# Altium PCB PCB1.PcbDoc (part 2 of 2)
Units mm, origin at the board's own origin, x right, y up, seen from the top; angles counter-clockwise.
Board outline 100 x 100 mm, 2 copper layers (Top Layer, Bottom Layer); 83 components, 120 nets, 440 pads, 148 vias.
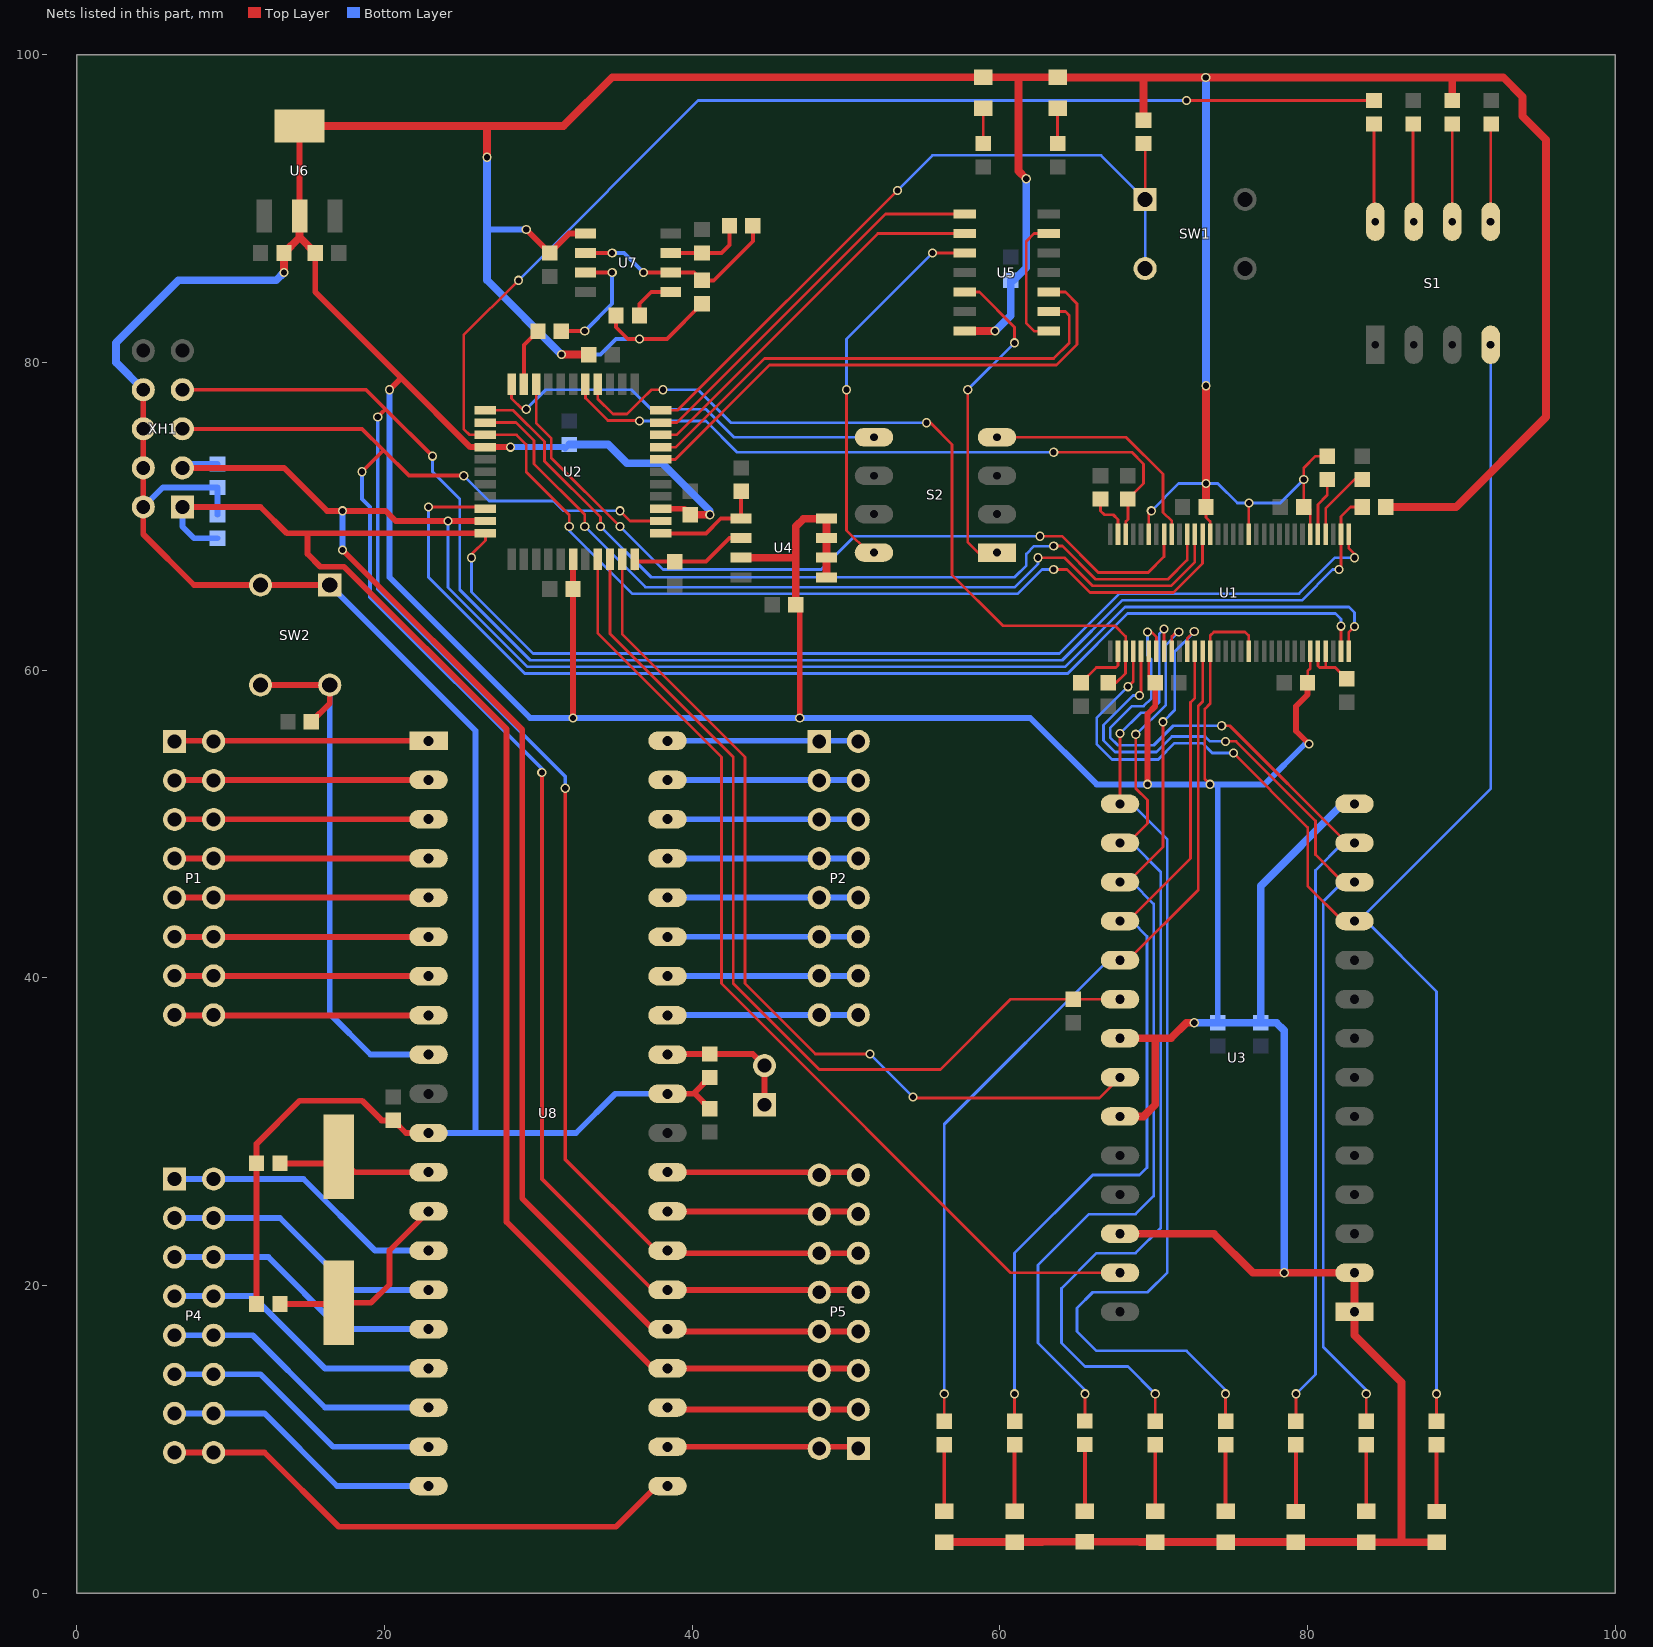
[diagram p2: the nets of this part, all layers, seen from the top]

## Via types
v1: diameter 0.6, hole 0.4, Top Layer to Bottom Layer, 144 vias
v2: diameter 4, hole 3, Top Layer to Bottom Layer, 4 vias

## Nets (pads, with @x,y where several pads share a name; then routed paths per layer and width w, separated by ;. In a path a pad name is that pad's centre, name@x,y a point inside that pad or via, vN(x,y) a via of type N, cw(c..) or ccw(c..) an arc to the next point about the centre after c; other vN are vias at no path point) (continued)
DAT03: U1.57 U2.42 | length 51.8
  Top Layer w0.178: U2.42@29.858,78.598 29.858,76.06 30.836,75.082 30.836,73.812 v1(35.306,69.342) ; v1(62.609,68.705) 62.619,68.715 64.03,68.715 66.4,66.345 69.647,66.345 70.68,67.378 U1.57@70.68,68.824
  Bottom Layer w0.178: v1(35.306,69.342) 38.1,66.548 48.389,66.548 50.546,68.705 v1(62.609,68.705)
DAT04: S2.4 U1.56 | length 15.6
  Top Layer w0.178: S2.4@60.198,75.144 68.215,75.144 70.612,72.747 70.612,70.258 71.18,69.69 U1.56@71.18,68.824
"DAT04 CPLD": S2.5 U2.44 | length 27
  Top Layer w0.178: U2.44@28.258,78.598 28.258,77.66 28.956,76.962 v1(29.21,76.962)
  Bottom Layer w0.178: v1(29.21,76.962) 30.48,78.232 36.068,78.232 37.338,76.962 40.894,76.962 42.712,75.144 S2.5@52.198,75.144
DAT05: U1.54 U2.1 | length 55.6
  Top Layer w0.178: U2.1@26.558,76.898 28.361,76.898 30.404,74.855 30.404,73.585 34.036,69.953 v1(34.036,69.342) ; v1(63.5,68.072) 64.062,68.072 66.221,65.913 70.939,65.913 72.18,67.154 U1.54@72.18,68.824
  Bottom Layer w0.178: v1(34.036,69.342) 37.338,66.04 60.96,66.04 61.722,66.802 61.722,67.564 62.221,68.063 63.491,68.063 v1(63.5,68.072)
DAT06: U1.53 U2.2 | length 56.1
  Top Layer w0.178: U2.2@26.558,76.098 28.55,76.098 29.718,74.93 29.718,73.406 33.02,70.104 v1(33.02,69.342) ; v1(62.484,67.31) 64.213,67.31 66.042,65.481 71.118,65.481 72.68,67.043 U1.53@72.68,68.824
  Bottom Layer w0.178: v1(33.02,69.342) 36.965,65.397 60.976,65.397 62.484,66.905 v1(62.484,67.31)
DAT07: R17.1 U1.52 U2.3 | length 129.7
  Top Layer w0.178: v1(28.702,85.344) 25.146,81.788 25.146,75.692 25.54,75.298 U2.3@26.558,75.298 28.588,75.298 29.21,74.676 29.21,72.898 32.004,70.104 v1(32.004,69.342) ; v1(63.5,66.548) 64.365,66.548 65.863,65.049 71.297,65.049 73.18,66.933 U1.52@73.18,68.824 ; v1(72.136,97.028) R17.1@84.328,97.028
  Bottom Layer w0.178: v1(28.702,85.344) 40.386,97.028 v1(72.136,97.028) ; v1(32.004,69.342) 32.004,69.088 36.127,64.965 61.155,64.965 62.738,66.548 v1(63.5,66.548)
DATA00: R22.2 S1.4 U1.4 U3.11 | length 107.9
  Top Layer w0.178: v1(68.326,58.928) 68.68,59.282 U1.4@68.68,61.224 ; v1(75.184,54.61) 80.01,49.784 80.01,45.974 82.296,43.688 U3.11@83.058,43.688 ; R22.2@88.392,11.176 v1(88.392,12.954)
  Bottom Layer w0.178: v1(68.326,58.928) 66.294,56.896 66.294,55.2 67.303,54.191 70.3,54.191 71.362,55.253 73.168,55.253 73.811,54.61 v1(75.184,54.61) ; U3.11@83.058,43.688 U3.11@83.312,43.688 ; v1(88.392,12.954) 88.392,39.116 83.82,43.688 U3.11@83.312,43.688 ; S1.4@91.908,81.154 91.908,52.284 U3.11@83.312,43.688
DATA01: R23.2 U1.5 U3.12 | length 67
  Top Layer w0.178: v1(69.088,58.35) 69.18,58.258 U1.5@69.18,61.224 ; v1(74.676,55.372) 75.351,55.372 80.518,50.205 80.518,48.006 82.296,46.228 U3.12@83.058,46.228 ; R23.2@83.82,11.176 v1(83.82,12.954)
  Bottom Layer w0.178: v1(69.088,58.35) 68.657,58.35 66.743,56.436 66.743,55.435 67.492,54.686 70.184,54.686 71.183,55.685 73.347,55.685 73.66,55.372 v1(74.676,55.372) ; U3.12@83.058,46.228 82.296,46.228 81.026,44.958 81.026,16.002 83.82,13.208 v1(83.82,12.954)
DATA02: R24.2 U1.7 U3.13 | length 69.8
  Top Layer w0.178: v1(69.596,62.484) 69.85,62.484 70.18,62.154 U1.7@70.18,61.224 ; v1(74.422,56.388) 74.946,56.388 82.566,48.768 U3.13@83.058,48.768 U3.13@83.312,48.768 ; R24.2@79.248,11.176 v1(79.248,12.954)
  Bottom Layer w0.178: v1(69.596,62.484) 69.596,60.96 69.85,60.706 69.85,58.166 69.342,57.658 68.58,57.658 67.175,56.253 67.175,55.614 67.671,55.118 70.005,55.118 71.275,56.388 v1(74.422,56.388) ; v1(79.248,12.954) 80.518,14.224 80.518,15.494 80.518,46.99 82.296,48.768 U3.13@83.058,48.768
DATA03: R25.2 U1.8 U3.15 | length 68.1
  Top Layer w0.178: U3.15@67.818,51.308 v1(67.818,55.88) ; U1.8@70.673,61.217 U1.8@70.68,61.224 v1(70.68,62.67) ; R25.2@74.676,11.176 v1(74.676,12.954)
  Bottom Layer w0.178: U3.15@67.818,51.308 68.58,51.308 70.891,48.997 70.891,20.853 69.596,19.558 66.04,19.558 65.024,18.542 65.024,17.018 66.294,15.748 72.136,15.748 74.676,13.208 v1(74.676,12.954) ; v1(67.818,55.88) 69.164,57.226 69.672,57.226 70.358,57.912 70.358,62.348 v1(70.68,62.67)
DATA04: R26.2 U1.9 U3.16 | length 65.3
  Top Layer w0.178: U3.16@67.818,48.768 68.326,48.768 69.596,50.038 69.596,51.562 68.834,52.324 v1(68.834,55.829) ; R26.2@70.104,11.176 v1(70.104,12.954) ; U1.9@71.18,61.224 71.18,62.2 71.464,62.484 v1(71.628,62.484)
  Bottom Layer w0.178: U3.16@67.818,48.768 68.58,48.768 70.46,46.888 70.46,23.724 68.834,22.098 66.294,22.098 64.008,19.812 64.008,16.256 65.532,14.732 68.326,14.732 v1(70.104,12.954) ; v1(68.834,55.829) 68.834,55.777 70.79,57.733 70.79,61.646 v1(71.628,62.484)
DATA05: R27.2 U1.11 U3.17 | length 62.6
  Top Layer w0.178: R27.2@65.532,11.192 v1(65.532,12.954) ; U3.17@67.818,46.228 68.326,46.228 70.612,48.514 v1(70.612,56.642) ; U1.11@72.18,61.224 72.18,62.059 v1(72.644,62.523)
  Bottom Layer w0.178: v1(65.532,12.954) 65.532,13.208 62.484,16.256 62.484,21.336 65.786,24.638 68.834,24.638 70.002,25.806 70.002,44.806 68.58,46.228 U3.17@67.818,46.228 ; v1(70.612,56.642) 71.374,57.404 71.374,61.214 72.644,62.484 v1(72.644,62.523)
DATA06: R28.2 U1.12 U3.18 | length 58.9
  Top Layer w0.178: R28.2@60.96,11.176 v1(60.96,12.954) ; U3.18@67.818,43.688 68.326,43.688 72.39,47.752 72.39,57.912 72.68,58.202 U1.12@72.68,61.224
  Bottom Layer w0.178: v1(60.96,12.954) 60.96,22.098 66.04,27.178 69.088,27.178 69.571,27.661 69.571,42.697 68.58,43.688 U3.18@67.818,43.688
DATA07: R29.2 U1.13 U3.19 | length 57.8
  Top Layer w0.178: R29.2@56.388,11.176 v1(56.388,12.954) ; U3.19@67.818,41.148 68.326,41.148 72.898,45.72 72.898,57.658 73.187,57.947 73.187,61.217 U1.13@73.18,61.224 U1.13@73.173,61.231
  Bottom Layer w0.178: v1(56.388,12.954) 56.388,30.48 67.056,41.148 U3.19@67.818,41.148
GND: C1.2 C2.2 C3.2 C4.2 C5.2 C6.2 C7.2 C8.2 C9.2 C10.2 C11.2 C12.2 C13.2 C14.2 C15.2 C16.2 C17.2 C18.2 C19.2 C20.2 C21.2 C22.1 D1.1 D2.1 D3.1 D4.1 D5.1 D6.1 D7.1 D8.1 D9.1 D10.1 R3.1 R4.1 R11.1 R13.1 R18.1 R19.1 SW2.1 SW2.2 U1.6 U1.14 U1.19 U1.27 U1.38 U1.46 U1.51 U1.59 U2.4 U2.17 U2.25 U3.1 U3.2 U3.14 U3.21 U3.23 U3.26 U4.1 U4.2 U4.3 U4.4 U4.7 U5.7 U6.2 U6.4 U7.1 U8.11 U8.31 XH1.2 XH1.4 XH1.6 XH1.8 | length 692.5
  Top Layer w0.178: U1.6@69.68,61.224 69.68,59.606 C6.2@70.104,59.182 ; U1.59@69.68,68.824 69.68,70.188 v1(69.85,70.358) ; C4.2@73.406,70.612 73.406,69.933 73.673,69.666 73.673,68.831 U1.51@73.68,68.824 ; v1(73.66,52.578) 73.33,52.908 73.33,57.479 73.68,57.829 U1.14@73.68,61.224 73.68,62.25 73.914,62.484 75.946,62.484 76.18,62.25 U1.19@76.18,61.224 ; U1.46@76.18,68.824 76.18,70.846 v1(76.2,70.866) ; C5.2@80.01,59.182 80.01,59.944 80.18,60.114 U1.27@80.18,61.224 ; U1.38@80.18,68.824 80.173,68.831 80.173,70.449 80.01,70.612 C3.2@79.756,70.612 v1(79.756,72.39) 79.756,73.152 80.518,73.914 R18.1@81.28,73.914
  Top Layer w0.254: C7.2@33.274,80.518 C7.2@33.274,80.536 ; C13.2@35.052,83.058 35.052,82.296 35.814,81.534 v1(36.576,81.534) 38.354,81.534 C12.2@40.64,83.82
  Top Layer w0.381: XH1.8@4.318,78.232 XH1.6@4.318,75.692 XH1.4@4.318,73.152 XH1.2@4.318,70.612 4.318,68.834 7.62,65.532 SW2.2@11.938,65.532 SW2.1@16.438,65.532 ; C19.2@11.684,18.796 C18.2@11.684,27.94 11.684,29.21 14.478,32.004 18.542,32.004 19.812,30.734 C21.2@20.574,30.734 21.396,29.912 U8.11@22.86,29.912 ; U6.2@14.478,89.531 U6.4@14.478,95.381 ; C2.2@15.494,87.122 15.494,84.582 21.082,78.994 ; v1(20.32,78.232) 21.082,78.994 ; v1(28.194,74.498) U2.4@26.558,74.498 25.578,74.498 21.082,78.994 ; v1(29.21,88.646) C11.2@30.734,87.122 32.004,88.392 U7.1@33.058,88.392 ; v1(32.258,56.896) C8.2@32.258,65.278 U2.17@32.258,67.198 ; U2.25@37.958,70.498 39.484,70.498 C9.2@39.878,70.104 ; U8.31@38.4,32.462 40.082,32.462 ; C22.1@41.148,31.496 40.182,32.462 40.082,32.462 ; C20.2@41.148,33.528 40.082,32.462 ; C16.2@46.736,64.262 46.99,64.008 v1(46.99,56.896) ; v1(69.596,52.578) 69.596,57.15 70.104,57.658 C6.2@70.104,59.182 ; C5.2@80.01,59.182 80.01,58.42 79.248,57.658 79.248,56.048 v1(80.094,55.202)
  Top Layer w0.508: v1(13.462,85.852) C1.2@13.462,87.122 14.478,88.138 ; U6.2@14.478,89.531 14.478,88.138 ; U6.4@14.478,95.381 26.67,95.381 ; C2.2@15.494,87.122 14.478,88.138 ; v1(26.67,93.349) 26.67,95.381 ; v1(31.496,80.518) C7.2@33.274,80.518 ; C9.2@39.878,70.104 v1(41.148,70.104) ; U4.7@43.18,67.31 46.736,67.31 ; C16.2@46.736,64.262 46.736,67.31 ; U4.1@48.73,66.04 U4.2@48.73,67.31 U4.3@48.73,68.58 U4.4@48.73,69.85 47.244,69.85 46.736,69.342 46.736,67.31 ; D8.1@56.388,3.318 D7.1@60.96,3.318 ; U5.7@57.727,82.042 v1(59.69,82.042) ; D7.1@60.976,3.334 D7.1@60.96,3.318 ; v1(61.722,91.948) 61.214,92.456 61.214,98.552 ; 62.738,3.318 D7.1@60.96,3.318 ; 62.754,3.334 D6.1@65.532,3.334 ; D6.1@65.548,3.318 D6.1@65.532,3.334 ; U3.26@67.818,23.368 73.914,23.368 76.454,20.828 v1(78.486,20.828) U3.2@83.058,20.828 U3.1@83.058,18.288 83.058,16.764 86.114,13.708 86.114,3.302 ; U3.23@67.818,30.988 69.342,30.988 70.104,31.75 70.104,36.068 ; U3.21@67.818,36.068 70.104,36.068 ; 69.088,3.334 D6.1@65.532,3.334 ; 69.104,3.318 D5.1@70.104,3.318 D4.1@74.676,3.318 ; R13.1@69.342,95.758 69.342,98.298 ; v1(72.644,37.084) 72.136,37.084 71.12,36.068 70.104,36.068 ; C4.2@73.406,70.612 v1(73.406,72.136) v1(73.406,78.486) ; 81.026,3.302 D3.1@79.248,3.302 74.692,3.302 D4.1@74.676,3.318 ; D2.1@83.804,3.302 D2.1@83.82,3.318 ; R19.1@85.09,70.612 89.662,70.612 95.504,76.454 95.504,94.488 93.98,96.012 93.98,97.282 92.726,98.536 89.408,98.536 ; D1.1@88.392,3.302 86.114,3.302 ; R11.1@89.408,97.028 89.408,98.536 ; 26.67,95.381 31.627,95.381 34.798,98.552 61.214,98.552 ; 61.214,98.552 63.738,98.552 D10.1@63.754,98.536 v1(73.39,98.536) 89.408,98.536 ; D4.1@74.676,3.318 D2.1@83.82,3.318 ; D2.1@83.82,3.318 83.836,3.302 86.114,3.302
  Bottom Layer w0.178: v1(69.85,70.358) 71.628,72.136 v1(73.406,72.136) 74.168,72.136 75.438,70.866 v1(76.2,70.866) 78.232,70.866 v1(79.756,72.39)
  Bottom Layer w0.254: v1(31.496,80.518) 34.036,80.518 35.052,81.534 v1(36.576,81.534)
  Bottom Layer w0.381: XH1.2@4.318,70.612 5.588,71.882 R4.1@9.144,71.882 R3.1@9.144,70.104 ; SW2.1@16.438,65.532 25.908,56.062 25.908,29.912 ; v1(20.32,78.232) 20.32,66.04 29.464,56.896 v1(32.258,56.896) v1(46.99,56.896) 61.976,56.896 66.294,52.578 v1(69.596,52.578) v1(73.66,52.578) 74.168,52.578 ; U8.11@22.86,29.912 25.908,29.912 ; 26.67,88.646 v1(29.21,88.646) ; v1(28.194,74.498) 31.674,74.498 31.75,74.422 C10.2@32.004,74.676 ; U8.31@38.4,32.462 35.002,32.462 32.452,29.912 25.908,29.912 ; C14.2@74.168,37.084 74.168,52.578 ; v1(80.094,55.202) 79.84,55.202 77.216,52.578 74.168,52.578
  Bottom Layer w0.508: XH1.8@4.318,78.232 2.54,80.01 2.54,81.28 6.604,85.344 12.954,85.344 v1(13.462,85.852) ; v1(26.67,93.349) 26.67,88.646 26.67,85.344 v1(31.496,80.518) ; C10.2@32.004,74.676 34.544,74.676 35.768,73.452 38.054,73.452 41.148,70.358 v1(41.148,70.104) ; v1(59.69,82.042) 60.706,83.058 C17.2@60.706,85.344 60.904,85.344 61.722,86.162 v1(61.722,91.948) ; v1(72.644,37.084) C14.2@74.168,37.084 C15.2@76.962,37.084 ; v1(73.39,98.536) 73.406,98.552 v1(73.406,78.486) ; v1(78.486,20.828) 78.486,36.576 77.978,37.084 C15.2@76.962,37.084 ; U3.14@83.058,51.308 82.296,51.308 76.962,45.974 C15.2@76.962,37.084
I2C_SCL: R20.1 U2.22 U4.6 | length 8.1
  Top Layer w0.254: U2.22@36.258,66.612 U2.22@36.258,67.056 ; U2.22@36.258,67.198 U2.22@36.258,67.056 ; U4.6@43.18,68.58 42.418,68.58 40.894,67.056 R20.1@38.862,67.056 U2.22@36.258,67.056
I2C_SDA: R21.1 U2.23 U4.5 | length 7.4
  Top Layer w0.254: U2.23@37.958,68.898 40.905,68.898 41.857,69.85 U4.5@43.18,69.85 R21.1@43.18,71.628
IN11: U2.32 U5.1 | length 25.4
  Top Layer w0.178: U2.32@37.958,76.098 39.014,76.098 52.578,89.662 U5.1@57.727,89.662
IN12: U2.31 U5.2 | length 25.2
  Top Layer w0.178: U2.31@37.958,75.298 38.976,75.298 52.07,88.392 U5.2@57.727,88.392
IN22: S2.1 U5.5 | length 21.6
  Top Layer w0.178: U5.5@57.727,84.582 58.674,84.582 60.96,82.296 v1(60.96,81.28) ; v1(57.912,78.232) 57.912,68.326 58.594,67.644 S2.1@59.816,67.644
  Bottom Layer w0.178: v1(57.912,78.232) v1(60.96,81.28)
IN31: U2.30 U5.9 | length 32.6
  Top Layer w0.178: U2.30@37.958,74.498 38.938,74.498 44.704,80.264 63.5,80.264 64.516,81.28 64.516,83.058 64.262,83.312 U5.9@63.177,83.312
IN32: U2.29 U5.10 | length 35
  Top Layer w0.178: U2.29@37.958,73.698 38.9,73.698 45.034,79.832 63.679,79.832 65.024,81.177 65.024,83.82 64.262,84.582 U5.10@63.177,84.582
NetC12_1: C12.1 R5.2 U7.2 U7.6 | length 13.7
  Top Layer w0.254: U7.2@33.058,87.122 v1(34.798,87.122) ; v1(36.83,85.852) U7.6@38.608,85.852 40.132,85.852 C12.1@40.64,85.344 41.402,85.344 43.942,87.884 R5.2@43.942,88.9
  Bottom Layer w0.254: v1(34.798,87.122) 35.56,87.122 v1(36.83,85.852)
NetC13_1: C13.1 U7.5 | length 3.1
  Top Layer w0.254: C13.1@36.576,83.058 36.576,83.82 37.338,84.582 U7.5@38.608,84.582
NetC18_1: C18.1 U8.12 X1.1 | length 10.2
  Top Layer w0.381: C18.1@13.208,27.94 16.586,27.94 X1.1@17.018,28.372 18.028,27.362 U8.12@22.86,27.362
NetC19_1: C19.1 U8.13 X1.2 | length 13.7
  Top Layer w0.381: C19.1@13.208,18.796 17.196,18.796 X1.2@17.272,18.872 ; X1.2@17.018,18.872 X1.2@17.272,18.872 ; U8.13@22.86,24.812 20.32,22.272 20.32,20.066 19.126,18.872 X1.2@17.272,18.872
NetC20_1: C20.1 P3.1 P3.2 U8.32 | length 9.2
  Top Layer w0.381: U8.32@38.4,35.012 38.44,35.052 C20.1@41.148,35.052 43.942,35.052 P3.2@44.704,34.29 P3.1@44.704,31.75
NetD1_2: D1.2 R22.1 | length 4.4
  Top Layer w0.254: D1.2@88.392,5.302 R22.1@88.392,9.652
NetD2_2: D2.2 R23.1 | length 4.3
  Top Layer w0.254: D2.2@83.82,5.318 R23.1@83.82,9.652
NetD3_2: D3.2 R24.1 | length 4.4
  Top Layer w0.254: D3.2@79.248,5.302 R24.1@79.248,9.652
NetD4_2: D4.2 R25.1 | length 4.3
  Top Layer w0.254: D4.2@74.676,5.318 R25.1@74.676,9.652
NetD5_2: D5.2 R26.1 | length 4.3
  Top Layer w0.254: D5.2@70.104,5.318 R26.1@70.104,9.652
NetD6_2: D6.2 R27.1 | length 4.3
  Top Layer w0.254: D6.2@65.532,5.334 R27.1@65.532,9.668
NetD7_2: D7.2 R28.1 | length 4.3
  Top Layer w0.254: D7.2@60.96,5.318 R28.1@60.96,9.652
NetD8_2: D8.2 R29.1 | length 4.3
  Top Layer w0.254: D8.2@56.388,5.318 R29.1@56.388,9.652
NetD9_2: D9.2 R30.1 | length 2.3
  Top Layer w0.178: R30.1@58.928,94.234 D9.2@58.928,96.536
NetD10_2: D10.2 R31.1 | length 2.3
  Top Layer w0.178: R31.1@63.754,94.234 D10.2@63.754,96.536
NetR5_1: R5.1 R6.2 U7.7 | length 5.3
  Top Layer w0.254: U7.7@38.608,87.122 R6.2@40.64,87.122 41.91,87.122 42.418,87.63 R5.1@42.418,88.9
NetR7_1: R7.1 U2.43 | length 3.8
  Top Layer w0.254: U2.43@29.058,78.598 29.058,81.128 R7.1@29.972,82.042
NetR7_2: R7.2 U7.3 | length 7.8
  Top Layer w0.254: R7.2@31.496,82.042 v1(33.02,82.042) ; U7.3@33.058,85.852 v1(34.798,85.852)
  Bottom Layer w0.254: v1(33.02,82.042) 34.798,83.82 v1(34.798,85.852)
NetR8_2: R8.2 U1.2 | length 3.8
  Top Layer w0.178: R8.2@65.278,59.182 66.277,60.181 67.547,60.181 67.68,60.314 U1.2@67.68,61.224
NetR9_1: R9.1 U1.63 | length 3.1
  Top Layer w0.178: R9.1@66.548,71.12 66.548,70.358 66.802,70.104 67.376,70.104 67.68,69.8 U1.63@67.68,68.824
NetR10_2: R10.2 S1.5 | length 6.4
  Top Layer w0.178: S1.5@91.908,89.154 91.908,95.464 R10.2@91.948,95.504
NetR11_2: R11.2 S1.6 | length 6.3
  Top Layer w0.178: S1.6@89.408,89.154 R11.2@89.408,95.504
NetR12_2: R12.2 S1.7 | length 6.4
  Top Layer w0.178: R12.2@86.868,95.504 86.868,89.194 S1.7@86.908,89.154
NetR13_2: R13.2 SW1.1 SW1.2 U2.33 | length 47.7
  Top Layer w0.178: U2.33@37.958,76.898 39.052,76.898 v1(53.34,91.186) ; R13.2@69.342,94.234 69.446,94.13 SW1.1@69.446,90.606
  Bottom Layer w0.178: v1(53.34,91.186) 55.626,93.472 66.58,93.472 SW1.1@69.446,90.606 SW1.2@69.446,86.106
NetR14_2: R14.2 U1.28 U1.29 | length 4.2
  Top Layer w0.178: U1.28@80.68,61.224 80.68,60.29 80.789,60.181 81.18,60.181 ; U1.29@81.187,61.217 U1.29@81.18,61.224 81.18,60.181 ; R14.2@82.55,59.436 81.805,60.181 81.18,60.181
NetR15_1: R15.1 U1.36 | length 4.9
  Top Layer w0.178: U1.36@81.18,68.824 81.18,70.512 83.058,72.39 R15.1@83.566,72.39
NetR17_2: R17.2 S1.8 | length 6.4
  Top Layer w0.178: R17.2@84.328,95.504 84.328,89.234 S1.8@84.408,89.154
NetR18_2: R18.2 U1.37 | length 3.8
  Top Layer w0.178: U1.37@80.68,68.824 80.68,70.774 81.28,71.374 R18.2@81.28,72.39
NetR32_2: R32.2 SW2.3 SW2.4 U8.9 | length 36.3
  Top Layer w0.381: SW2.4@11.938,59.032 SW2.3@16.438,59.032 16.438,57.84 R32.2@15.24,56.642
  Bottom Layer w0.381: SW2.3@16.438,59.032 16.438,37.664 19.09,35.012 U8.9@22.86,35.012
nOEAB: R1.1 U1.3 U2.37 | length 51.7
  Top Layer w0.178: U2.37@33.858,78.598 33.858,77.648 34.848,76.658 35.764,76.658 36.661,77.555 36.675,77.555 37.352,78.232 v1(38.1,78.232) ; v1(55.231,76.087) 55.485,76.087 56.896,74.676 56.896,66.191 60.197,62.89 67.489,62.89 68.18,62.2 U1.3@68.18,61.224 68.173,61.217 68.173,59.791 67.564,59.182 R1.1@67.056,59.182
  Bottom Layer w0.178: v1(38.1,78.232) 40.386,78.232 42.531,76.087 v1(55.231,76.087)
nOEBA: R2.1 U1.62 U2.38 | length 44
  Top Layer w0.178: U2.38@33.058,78.598 33.058,77.686 34.518,76.226 36.296,76.226 36.322,76.2 v1(36.576,76.2) ; v1(63.5,74.168) 68.58,74.168 69.342,73.406 69.342,72.136 R2.1@68.326,71.12 68.326,69.805 68.187,69.666 68.187,68.831 U1.62@68.18,68.824
  Bottom Layer w0.178: v1(36.576,76.2) 40.894,76.2 42.926,74.168 v1(63.5,74.168)
OUT1: S2.8 U5.3 | length 25.7
  Top Layer w0.178: v1(50.038,78.232) 50.038,69.088 51.482,67.644 S2.8@51.816,67.644 52.198,67.644 S2.8@52.198,67.182 ; v1(55.626,87.122) U5.3@57.727,87.122
  Bottom Layer w0.178: v1(50.038,78.232) 50.038,81.534 v1(55.626,87.122)
OUT3: U5.8 U5.13 | length 8.7
  Top Layer w0.178: U5.8@63.177,82.042 62.23,82.042 61.722,82.55 61.722,87.884 62.23,88.392 U5.13@63.177,88.392
PA0: P2.1 P2.2 U8.40 | length 12.4
  Bottom Layer w0.381: U8.40@38.4,55.412 50.76,55.412 P2.2@50.8,55.372
PA1: P2.3 P2.4 U8.39 | length 12.4
  Bottom Layer w0.381: U8.39@38.4,52.862 50.77,52.862 P2.4@50.8,52.832
PA2: P2.5 P2.6 U8.38 | length 12.4
  Bottom Layer w0.381: U8.38@38.4,50.312 50.78,50.312 P2.6@50.8,50.292
PA3: P2.7 P2.8 U8.37 | length 13.4
  Bottom Layer w0.381: U8.37@38.4,47.762 49.784,47.762 ; 49.784,47.762 50.79,47.762 P2.8@50.8,47.752 49.794,47.752 49.784,47.762
PA4: P2.9 P2.10 U8.36 | length 12.4
  Bottom Layer w0.381: U8.36@38.4,45.212 P2.9@48.26,45.212 P2.10@50.8,45.212
PA5: P2.11 P2.12 U8.35 | length 12.4
  Bottom Layer w0.381: U8.35@38.4,42.662 38.41,42.672 P2.11@48.26,42.672 P2.12@50.8,42.672
PA6: P2.13 P2.14 U8.34 | length 12.4
  Bottom Layer w0.381: U8.34@38.4,40.112 50.78,40.112 P2.14@50.8,40.132
PA7: P2.15 P2.16 U8.33 | length 12.4
  Bottom Layer w0.381: U8.33@38.4,37.562 38.43,37.592 P2.15@48.26,37.592 P2.16@50.8,37.592
PB0: P1.1 P1.2 U8.1 | length 16.5
  Top Layer w0.381: P1.1@6.35,55.412 U8.1@22.86,55.412
PB1: P1.3 P1.4 U8.2 | length 16.5
  Top Layer w0.381: P1.3@6.35,52.872 6.36,52.862 U8.2@22.86,52.862
PB2: P1.5 P1.6 U8.3 | length 16.5
  Top Layer w0.381: P1.5@6.35,50.332 6.37,50.312 U8.3@22.86,50.312
PB3: P1.7 P1.8 U8.4 | length 16.5
  Top Layer w0.381: P1.7@6.35,47.792 6.38,47.762 U8.4@22.86,47.762
PB4: P1.9 P1.10 U8.5 | length 16.5
  Top Layer w0.381: P1.9@6.35,45.252 6.39,45.212 P1.10@8.89,45.212 U8.5@22.86,45.212
PB5: P1.11 P1.12 U8.6 | length 16.5
  Top Layer w0.381: P1.11@6.35,42.712 6.4,42.662 U8.6@22.86,42.662
PB6: P1.13 P1.14 U8.7 | length 16.5
  Top Layer w0.381: P1.13@6.35,40.172 6.41,40.112 U8.7@22.86,40.112
PB7: P1.15 P1.16 U8.8 | length 16.5
  Top Layer w0.381: P1.15@6.35,37.632 6.42,37.562 U8.8@22.86,37.562
PC0: P5.1 P5.2 U8.22 | length 12.4
  Top Layer w0.381: U8.22@38.4,9.512 50.686,9.512 P5.1@50.8,9.398
PC1: P5.3 P5.4 U8.23 | length 12.5
  Top Layer w0.381: U8.23@38.4,12.062 38.524,11.938 P5.4@48.26,11.938 P5.3@50.8,11.938
PC6: P5.13 P5.14 U8.28 | length 12.5
  Top Layer w0.381: U8.28@38.4,24.812 50.626,24.812 P5.13@50.8,24.638
PC7: P5.15 P5.16 U8.29 | length 12.5
  Top Layer w0.381: U8.29@38.4,27.362 50.616,27.362 P5.15@50.8,27.178
PD0: P4.1 P4.2 U8.14 | length 18.4
  Bottom Layer w0.381: P4.1@6.35,26.924 P4.2@8.89,26.924 14.732,26.924 19.394,22.262 U8.14@22.86,22.262
PD1: P4.3 P4.4 U8.15 | length 18.4
  Bottom Layer w0.381: P4.3@6.35,24.384 P4.4@8.89,24.384 13.208,24.384 17.88,19.712 U8.15@22.86,19.712
PD2: P4.5 P4.6 U8.16 | length 18.4
  Bottom Layer w0.381: P4.5@6.35,21.844 P4.6@8.89,21.844 12.446,21.844 17.128,17.162 U8.16@22.86,17.162
PD3: P4.7 P4.8 U8.17 | length 18.5
  Bottom Layer w0.381: P4.7@6.35,19.304 P4.8@8.89,19.304 11.43,19.304 16.122,14.612 U8.17@22.86,14.612
PD4: P4.9 P4.10 U8.18 | length 18.5
  Bottom Layer w0.381: P4.9@6.35,16.764 P4.10@8.89,16.764 11.43,16.764 16.132,12.062 U8.18@22.86,12.062
PD5: P4.11 P4.12 U8.19 | length 18.5
  Bottom Layer w0.381: P4.11@6.35,14.224 P4.12@8.89,14.224 11.938,14.224 16.65,9.512 U8.19@22.86,9.512
PD6: P4.13 P4.14 U8.20 | length 18.5
  Bottom Layer w0.381: P4.13@6.35,11.684 P4.14@8.89,11.684 12.192,11.684 16.914,6.962 U8.20@22.86,6.962
PD7: P4.15 P4.16 U8.21 | length 35.1
  Top Layer w0.381: P4.15@6.35,9.144 P4.16@8.89,9.144 12.192,9.144 17.018,4.318 35.052,4.318 37.696,6.962 U8.21@38.4,6.962
"RAM nCE": R16.1 U2.20 U3.20 | length 60.2
  Top Layer w0.178: U2.20@34.658,67.198 34.658,62.37 42.672,54.356 42.672,39.624 48.26,34.036 56.134,34.036 60.706,38.608 R16.1@64.77,38.608 U3.20@67.818,38.608
"RAM nOE": U2.21 U3.22 | length 59.7
  Top Layer w0.178: U2.21@35.458,67.198 35.458,62.332 43.434,54.356 43.434,39.624 48.006,35.052 v1(51.562,35.052) ; v1(54.356,32.258) 54.432,32.182 66.472,32.182 U3.22@67.818,33.528 U3.22@67.056,33.528
  Bottom Layer w0.178: v1(51.562,35.052) v1(54.356,32.258)
"RAM nWE": U2.19 U3.27 | length 64.6
  Top Layer w0.178: U2.19@33.858,67.198 33.858,62.408 41.91,54.356 41.91,39.624 60.706,20.828 U3.27@67.818,20.828
TCK_UUT: P5.5 P5.6 R3.2 U1.33 U2.11 U8.24 XH1.1 | length 169.7
  Top Layer w0.178: v1(25.654,67.31) 25.654,67.534 26.558,68.438 U2.11@26.558,68.898 ; U1.33@82.68,68.824 82.68,67.942 83.058,67.564 v1(83.058,67.31)
  Top Layer w0.381: XH1.1@6.858,70.612 11.938,70.612 13.652,68.898 14.986,68.898 ; U2.11@26.558,68.898 14.986,68.898 ; P5.5@50.8,14.478 50.666,14.612 U8.24@38.4,14.612 37.458,14.612 27.94,24.13 27.94,56.157 17.371,66.726 15.824,66.726 14.986,67.564 14.986,68.898
  Bottom Layer w0.178: v1(25.654,67.31) 25.654,65.078 29.653,61.079 63.878,61.079 67.774,64.975 79.453,64.975 81.792,67.314 82.439,67.314 ; 82.439,67.302 82.439,67.314 ; v1(83.058,67.31) 82.443,67.31 82.439,67.314
  Bottom Layer w0.381: XH1.1@6.858,70.612 6.858,69.342 7.62,68.58 R3.2@9.144,68.58
TDI_UUT: P5.11 P5.12 R19.2 U1.34 U8.27 XH1.7 | length 169.7
  Top Layer w0.178: v1(82.042,66.548) 82.173,66.679 82.173,68.817 U1.34@82.18,68.824 82.18,69.988 82.804,70.612 R19.2@83.566,70.612
  Top Layer w0.254: XH1.7@6.858,78.232 18.796,78.232 20.066,76.962 ; v1(19.558,76.454) 19.812,76.708 20.066,76.962 ; v1(23.114,73.914) 20.066,76.962 ; v1(31.75,52.324) 31.75,28.194 37.682,22.262 U8.27@38.4,22.262
  Top Layer w0.381: U8.27@38.4,22.262 38.564,22.098 P5.12@48.26,22.098 P5.11@50.8,22.098
  Bottom Layer w0.178: v1(23.114,73.914) 23.114,72.898 24.892,71.12 24.892,65.229 29.474,60.647 64.057,60.647 67.953,64.543 79.632,64.543 81.637,66.548 v1(82.042,66.548)
  Bottom Layer w0.254: v1(19.558,76.454) 19.558,65.278 31.75,53.086 v1(31.75,52.324)
TDO_U1: U1.31 U2.9 | length 74.1
  Top Layer w0.178: v1(22.86,70.612) 26.444,70.612 U2.9@26.558,70.498 ; v1(82.173,62.861) 82.173,61.231 U1.31@82.18,61.224
  Bottom Layer w0.178: v1(22.86,70.612) 22.86,66.04 29.116,59.784 64.415,59.784 68.311,63.68 81.824,63.68 82.173,63.331 v1(82.173,62.861)
TDO_UUT: P5.9 P5.10 U2.24 U8.26 XH1.5 | length 110
  Top Layer w0.178: v1(35.306,70.358) 35.966,69.698 U2.24@37.958,69.698
  Top Layer w0.254: XH1.5@6.858,75.692 18.542,75.692 19.939,74.295 ; v1(18.542,72.898) 19.939,74.295 ; v1(25.146,72.644) 21.59,72.644 19.939,74.295 ; v1(30.226,53.34) 30.226,26.924 37.438,19.712 U8.26@38.4,19.712
  Top Layer w0.381: U8.26@38.4,19.712 50.646,19.712 P5.9@50.8,19.558
  Bottom Layer w0.178: v1(25.146,72.644) 26.789,71.001 31,71.001 31.643,70.358 v1(35.306,70.358)
  Bottom Layer w0.254: v1(18.542,72.898) 18.542,71.12 19.05,70.612 19.05,64.77 30.226,53.594 v1(30.226,53.34)
TMS_UUT: P5.7 P5.8 R4.2 U1.32 U2.10 U8.25 XH1.3 | length 168.3
  Top Layer w0.178: U1.32@82.68,61.224 82.68,62.459 v1(83.058,62.837)
  Top Layer w0.381: XH1.3@6.858,73.152 13.462,73.152 16.256,70.358 v1(17.272,70.358) 20.066,70.358 20.726,69.698 v1(24.13,69.698) U2.10@26.558,69.698 ; v1(17.272,67.818) 28.956,56.134 28.956,25.654 37.448,17.162 U8.25@38.4,17.162 38.544,17.018 P5.8@48.26,17.018 P5.7@50.8,17.018
  Bottom Layer w0.178: v1(24.13,69.698) 24.13,65.381 29.295,60.216 64.236,60.216 68.132,64.111 82.701,64.111 83.058,63.754 v1(83.058,62.837)
  Bottom Layer w0.381: XH1.3@6.858,73.152 7.112,73.406 R4.2@9.144,73.406 ; v1(17.272,67.818) v1(17.272,70.358)
pads on no net: U1.1 U1.30 U1.35 U1.64 U2.36 XH1.9
copper on no net:
  other v2: 2.794,3.048 97.028,3.302 3.302,97.028 97.028,97.028

## Polygon pours and split planes (outlines as drawn)
GND on Top Layer "GND_TOP" (solid, remove dead copper, pour order 0): 0,0 0,100 100,100 100,0
GND on Bottom Layer "GND_BOT" (solid, remove dead copper, pour order 1): 0,0 0,100 100,100 100,0

## Other copper
Bottom Layer:
  region net DAT05: 38.354,66.04

## Silkscreen, mask and mechanical layers (free items; w line width, h text height)
Top Overlay:
  text "CLUSTER1" at 50.038,97.028 h1.02
  text "CLUSTER2" at 64.516,97.028 h1.02
  text "DAT7" at 82.55,92.964 h1.02
  text "GND" at 88.138,92.964 h1.02
  text "AD9->3V3 / FAULT" at 71.12,91.694 h1.02
  text "DAT0" at 85.344,91.186 h1.02
  text "3V3" at 90.678,91.186 h1.02
  text "5V" at 1.016,80.264 h1.02
  text "AD6" at 83.058,78.486 h1.02
  text "AD2" at 88.138,78.486 h1.02
  text "TDI" at 9.144,77.47 h1.52
  text "DAT1" at 85.344,76.962 h1.02
  text "DAT0" at 90.17,76.962 h1.02
  text "DAT4" at 47.244,75.692 h1.02
  text "DAT4" at 60.96,75.692 h1.02
  text "TDO" at 9.144,74.93 h1.52
  text "AD4" at 48.006,73.152 h1.02
  text "AD4" at 61.214,72.898 h1.02
  text "TMS" at 9.144,72.39 h1.52
  text "AD5" at 61.214,70.866 h1.02
  text "AD5" at 48.006,70.612 h1.02
  text "TCK" at 9.144,69.85 h1.52
  text "OUT1" at 50.038,65.786 h1.02
  text "IN22" at 57.912,65.786 h1.02
  text "ATMEGA / RESET" at 18.034,60.706 h1.02

## Text inside footprints (layer, text, board x,y; h text height)
C1: Mechanical 17 "d" at 11.811,86.995 h0.25; Mechanical 19 "-" at 11.811,86.995 h0.25
C2: Mechanical 17 "d" at 17.145,87.249 h0.25 r180; Mechanical 19 "-" at 17.145,87.249 h0.25 r180
C3: Mechanical 17 "d" at 78.105,70.485 h0.25; Mechanical 19 "-" at 78.105,70.485 h0.25
C4: Mechanical 17 "d" at 71.755,70.485 h0.25; Mechanical 19 "-" at 71.755,70.485 h0.25
C5: Mechanical 17 "d" at 78.359,59.055 h0.25; Mechanical 19 "-" at 78.359,59.055 h0.25
C6: Mechanical 17 "d" at 71.755,59.309 h0.25 r180; Mechanical 19 "-" at 71.755,59.309 h0.25 r180
C7: Mechanical 17 "d" at 34.925,80.645 h0.25 r180; Mechanical 19 "-" at 34.925,80.645 h0.25 r180
C8: Mechanical 17 "d" at 30.607,65.151 h0.25; Mechanical 19 "-" at 30.607,65.151 h0.25
C9: Mechanical 17 "d" at 39.751,71.755 h0.25 r270; Mechanical 19 "-" at 39.751,71.755 h0.25 r270
C10: Mechanical 17 "d" at 32.131,76.327 h0.25 r90; Mechanical 19 "-" at 32.131,76.327 h0.25 r90
C11: Mechanical 17 "d" at 30.861,85.471 h0.25 r90; Mechanical 19 "-" at 30.861,85.471 h0.25 r90
C12: Mechanical 17 "d" at 40.513,85.471 h0.25 r270; Mechanical 19 "-" at 40.513,85.471 h0.25 r270
C13: Mechanical 17 "d" at 36.703,83.185 h0.25 r180; Mechanical 19 "-" at 36.703,83.185 h0.25 r180
C14: Mechanical 17 "d" at 74.041,35.433 h0.25 r270; Mechanical 19 "-" at 74.041,35.433 h0.25 r270
C15: Mechanical 17 "d" at 76.835,35.433 h0.25 r270; Mechanical 19 "-" at 76.835,35.433 h0.25 r270
C16: Mechanical 17 "d" at 45.085,64.135 h0.25; Mechanical 19 "-" at 45.085,64.135 h0.25
C17: Mechanical 17 "d" at 60.833,86.995 h0.25 r90; Mechanical 19 "-" at 60.833,86.995 h0.25 r90
C18: Mechanical 17 "d" at 13.335,28.067 h0.25 r180; Mechanical 19 "-" at 13.335,28.067 h0.25 r180
C19: Mechanical 17 "d" at 13.335,18.923 h0.25 r180; Mechanical 19 "-" at 13.335,18.923 h0.25 r180
C20: Mechanical 17 "d" at 41.021,35.179 h0.25 r270; Mechanical 19 "-" at 41.021,35.179 h0.25 r270
C21: Mechanical 17 "d" at 20.447,32.385 h0.25 r270; Mechanical 19 "-" at 20.447,32.385 h0.25 r270
C22: Mechanical 17 "d" at 41.021,31.623 h0.25 r270; Mechanical 19 "-" at 41.021,31.623 h0.25 r270
D1: Mechanical 17 "d" at 88.519,3.413 h0.25 r90; Mechanical 19 "-" at 88.519,3.413 h0.25 r90
D2: Mechanical 17 "d" at 83.947,3.429 h0.25 r90; Mechanical 19 "-" at 83.947,3.429 h0.25 r90
D3: Mechanical 17 "d" at 79.375,3.413 h0.25 r90; Mechanical 19 "-" at 79.375,3.413 h0.25 r90
D4: Mechanical 17 "d" at 74.803,3.429 h0.25 r90; Mechanical 19 "-" at 74.803,3.429 h0.25 r90
D5: Mechanical 17 "d" at 70.231,3.429 h0.25 r90; Mechanical 19 "-" at 70.231,3.429 h0.25 r90
D6: Mechanical 17 "d" at 65.659,3.445 h0.25 r90; Mechanical 19 "-" at 65.659,3.445 h0.25 r90
D7: Mechanical 17 "d" at 61.087,3.429 h0.25 r90; Mechanical 19 "-" at 61.087,3.429 h0.25 r90
D8: Mechanical 17 "d" at 56.515,3.429 h0.25 r90; Mechanical 19 "-" at 56.515,3.429 h0.25 r90
D9: Mechanical 17 "d" at 58.801,98.425 h0.25 r270; Mechanical 19 "-" at 58.801,98.425 h0.25 r270
D10: Mechanical 17 "d" at 63.627,98.425 h0.25 r270; Mechanical 19 "-" at 63.627,98.425 h0.25 r270
P1: Top Overlay "16" at 8.128,34.544 h1.27; Top Overlay "15" at 5.334,34.544 h1.27; Top Overlay "1" at 6.096,57.15 h1.27; Top Overlay "2" at 8.636,57.15 h1.27
P2: Top Overlay "16" at 50.038,34.544 h1.27; Top Overlay "15" at 47.244,34.544 h1.27; Top Overlay "1" at 48.006,57.15 h1.27; Top Overlay "2" at 50.546,57.15 h1.27
P4: Top Overlay "16" at 8.128,6.096 h1.27; Top Overlay "15" at 5.334,6.096 h1.27; Top Overlay "1" at 6.35,28.702 h1.27; Top Overlay "2" at 8.636,28.702 h1.27
P5: Top Overlay "16" at 46.99,28.956 h1.27; Top Overlay "15" at 49.784,28.956 h1.27; Top Overlay "1" at 50.8,6.604 h1.27; Top Overlay "2" at 47.752,6.604 h1.27
R1: Mechanical 17 "d" at 67.183,59.182 h0.25 r270; Mechanical 19 "-" at 66.675,59.182 h0.25 r270
R2: Mechanical 17 "d" at 68.199,71.12 h0.25 r90; Mechanical 19 "-" at 68.707,71.12 h0.25 r90
R3: Mechanical 17 "d" at 9.017,70.104 h0.25 r90; Mechanical 19 "-" at 9.525,70.104 h0.25 r90
R4: Mechanical 17 "d" at 9.271,71.882 h0.25 r270; Mechanical 19 "-" at 8.763,71.882 h0.25 r270
R5: Mechanical 17 "d" at 42.418,89.027 h0.25; Mechanical 19 "-" at 42.418,88.519 h0.25
R6: Mechanical 17 "d" at 40.767,88.646 h0.25 r270; Mechanical 19 "-" at 40.259,88.646 h0.25 r270
R7: Mechanical 17 "d" at 29.972,82.169 h0.25; Mechanical 19 "-" at 29.972,81.661 h0.25
R8: Mechanical 17 "d" at 65.151,57.658 h0.25 r90; Mechanical 19 "-" at 65.659,57.658 h0.25 r90
R9: Mechanical 17 "d" at 66.421,71.12 h0.25 r90; Mechanical 19 "-" at 66.929,71.12 h0.25 r90
R10: Mechanical 17 "d" at 92.075,97.028 h0.25 r270; Mechanical 19 "-" at 91.567,97.028 h0.25 r270
R11: Mechanical 17 "d" at 89.535,97.028 h0.25 r270; Mechanical 19 "-" at 89.027,97.028 h0.25 r270
R12: Mechanical 17 "d" at 86.995,97.028 h0.25 r270; Mechanical 19 "-" at 86.487,97.028 h0.25 r270
R13: Mechanical 17 "d" at 69.469,95.758 h0.25 r270; Mechanical 19 "-" at 68.961,95.758 h0.25 r270
R14: Mechanical 17 "d" at 82.423,57.912 h0.25 r90; Mechanical 19 "-" at 82.931,57.912 h0.25 r90
R15: Mechanical 17 "d" at 83.439,72.39 h0.25 r90; Mechanical 19 "-" at 83.947,72.39 h0.25 r90
R16: Mechanical 17 "d" at 64.897,38.608 h0.25 r270; Mechanical 19 "-" at 64.389,38.608 h0.25 r270
R17: Mechanical 17 "d" at 84.455,97.028 h0.25 r270; Mechanical 19 "-" at 83.947,97.028 h0.25 r270
R18: Mechanical 17 "d" at 81.407,73.914 h0.25 r270; Mechanical 19 "-" at 80.899,73.914 h0.25 r270
R19: Mechanical 17 "d" at 85.09,70.485 h0.25 r180; Mechanical 19 "-" at 85.09,70.993 h0.25 r180
R20: Mechanical 17 "d" at 38.989,67.056 h0.25 r270; Mechanical 19 "-" at 38.481,67.056 h0.25 r270
R21: Mechanical 17 "d" at 43.053,71.628 h0.25 r90; Mechanical 19 "-" at 43.561,71.628 h0.25 r90
R22: Mechanical 17 "d" at 88.265,9.652 h0.25 r90; Mechanical 19 "-" at 88.773,9.652 h0.25 r90
R23: Mechanical 17 "d" at 83.693,9.652 h0.25 r90; Mechanical 19 "-" at 84.201,9.652 h0.25 r90
R24: Mechanical 17 "d" at 79.121,9.652 h0.25 r90; Mechanical 19 "-" at 79.629,9.652 h0.25 r90
R25: Mechanical 17 "d" at 74.549,9.652 h0.25 r90; Mechanical 19 "-" at 75.057,9.652 h0.25 r90
R26: Mechanical 17 "d" at 69.977,9.652 h0.25 r90; Mechanical 19 "-" at 70.485,9.652 h0.25 r90
R27: Mechanical 17 "d" at 65.405,9.668 h0.25 r90; Mechanical 19 "-" at 65.913,9.668 h0.25 r90
R28: Mechanical 17 "d" at 60.833,9.652 h0.25 r90; Mechanical 19 "-" at 61.341,9.652 h0.25 r90
R29: Mechanical 17 "d" at 56.261,9.652 h0.25 r90; Mechanical 19 "-" at 56.769,9.652 h0.25 r90
R30: Mechanical 17 "d" at 59.055,94.234 h0.25 r270; Mechanical 19 "-" at 58.547,94.234 h0.25 r270
R31: Mechanical 17 "d" at 63.881,94.234 h0.25 r270; Mechanical 19 "-" at 63.373,94.234 h0.25 r270
R32: Mechanical 17 "d" at 13.716,56.769 h0.25; Mechanical 19 "-" at 13.716,56.261 h0.25
X1: Mechanical 17 "d" at 16.51,28.448 h1.02 r270; Mechanical 19 "-" at 16.51,28.448 h1.02 r270
XH1: Top Overlay "2" at 3.81,67.818 h1.27; Top Overlay "1" at 6.604,67.818 h1.27; Top Overlay "9" at 6.35,82.55 h1.27; Top Overlay "10" at 3.556,82.55 h1.27